# Altium PCB EVB_PHY_SZ18201_V1.0.1.PcbDoc
Units mil, origin at the board's own origin, x right, y up, seen from the top; angles counter-clockwise.
Board outline 6000 x 4000 mil, 4 copper layers (Top, L2, L3, Bottom), stack 35.4 mil thick; 66 components, 51 nets, 228 pads, 165 vias.
Unrouted connection lines stored in the file: 125.
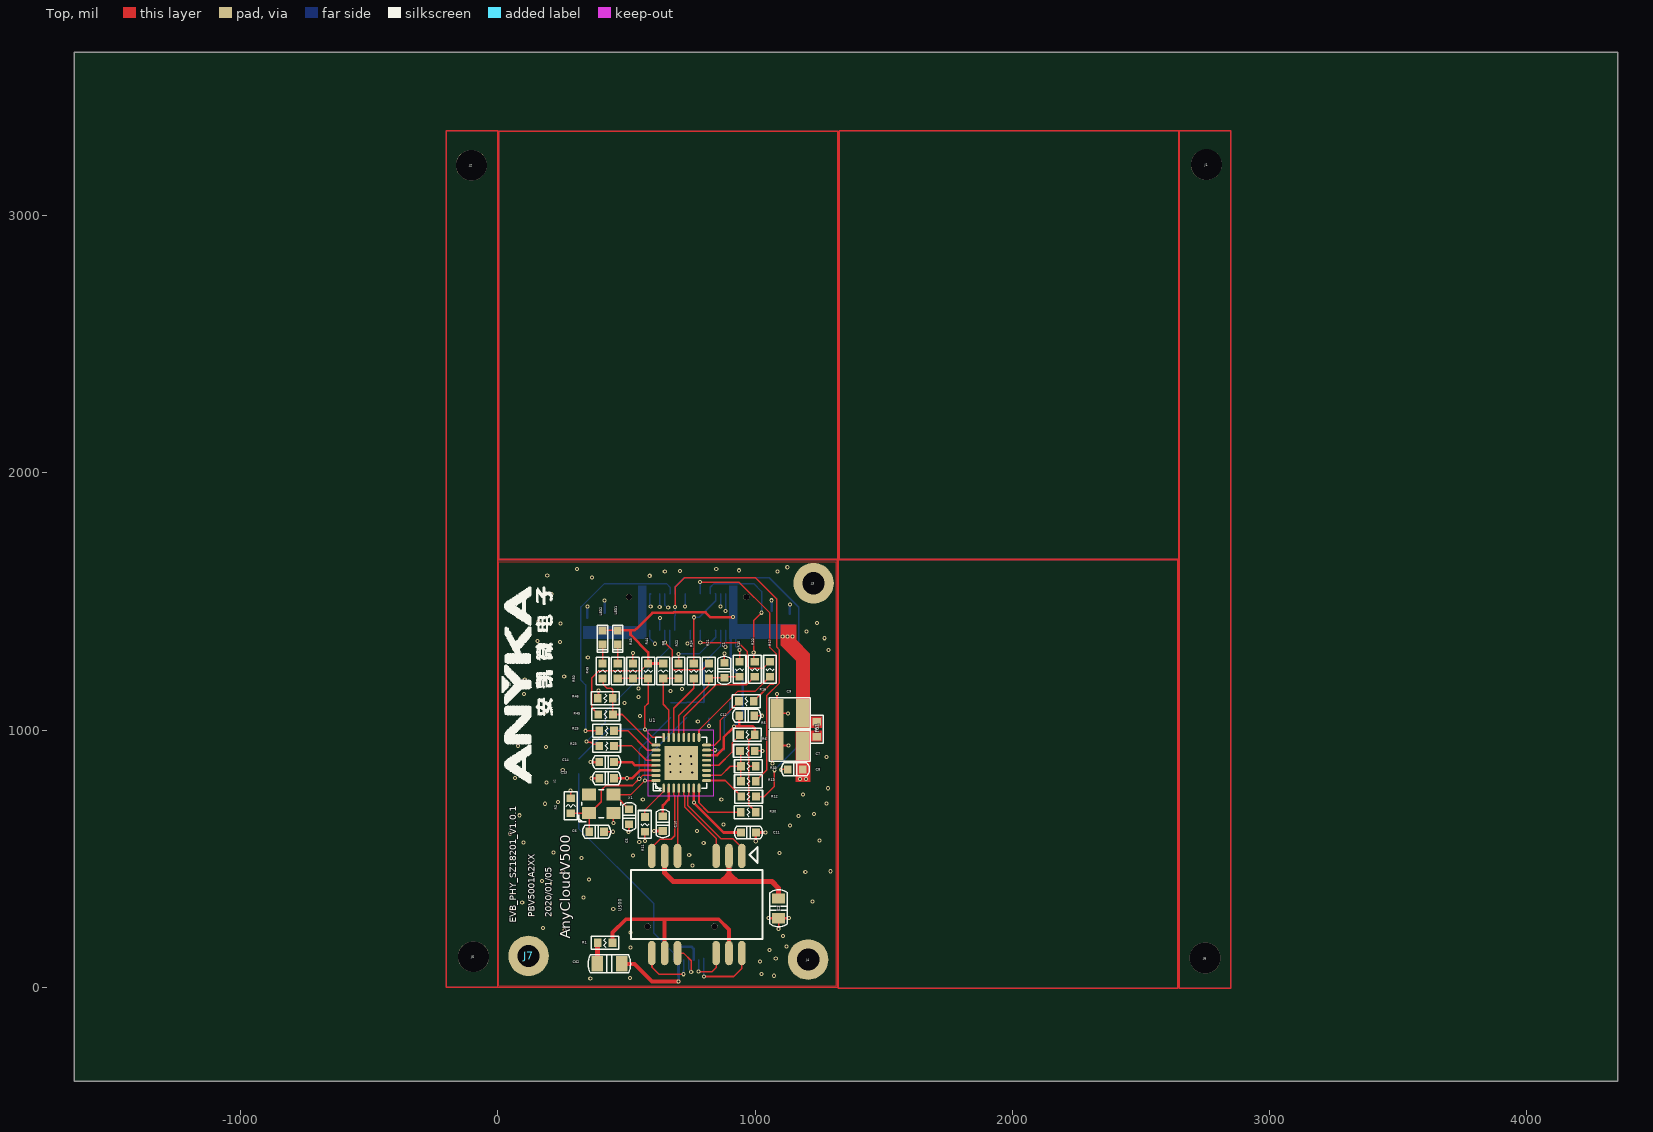
[diagram p0: Top view]
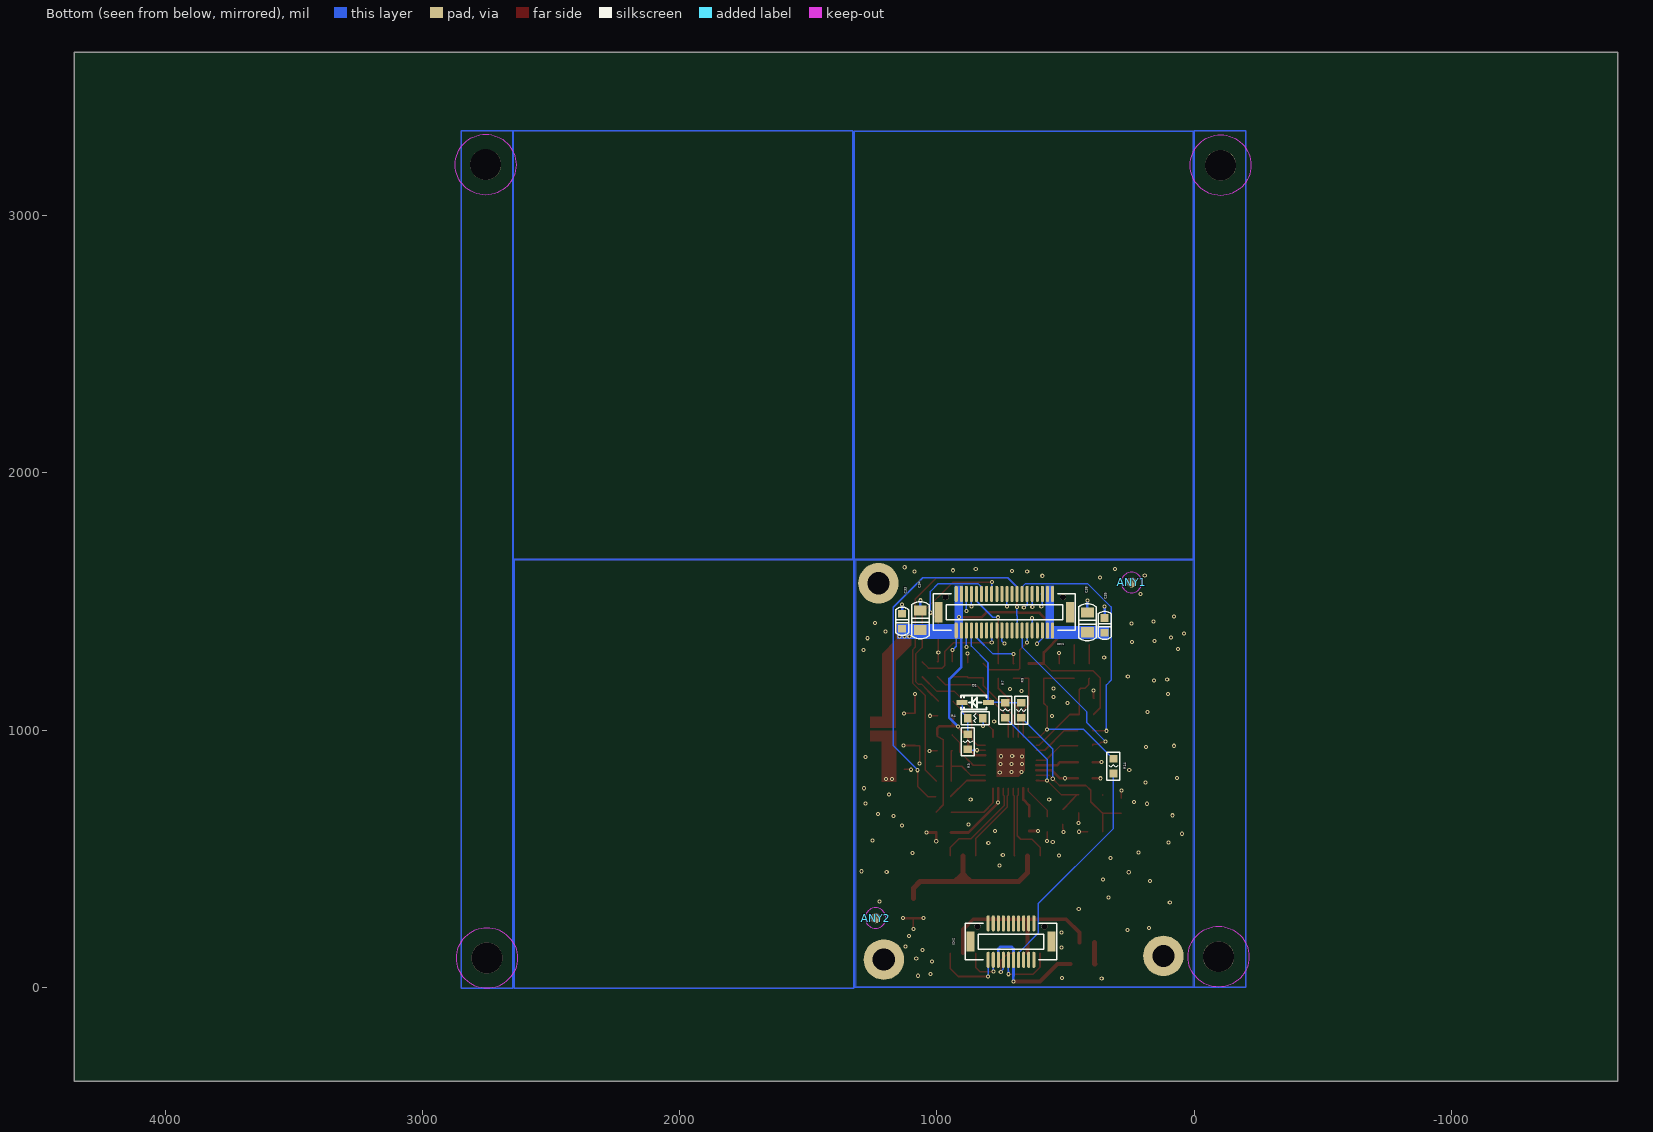
[diagram p1: Bottom view, seen from below]
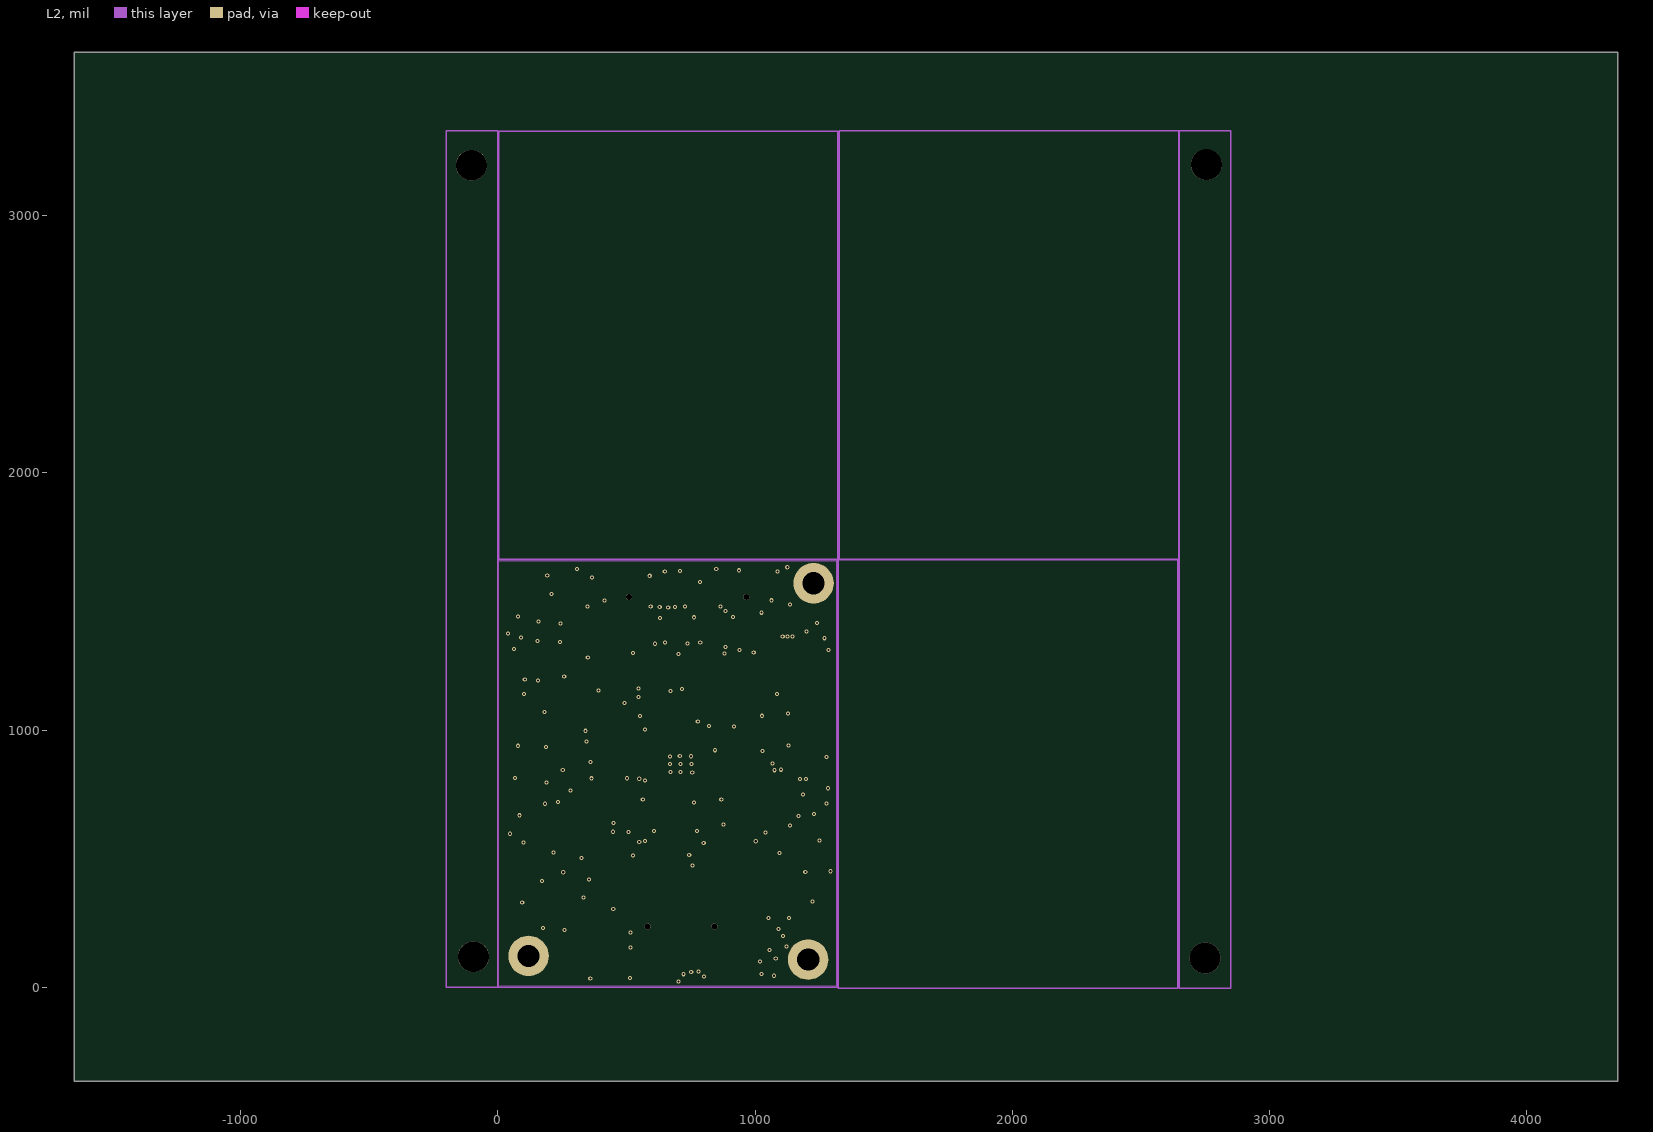
[diagram p2: L2]
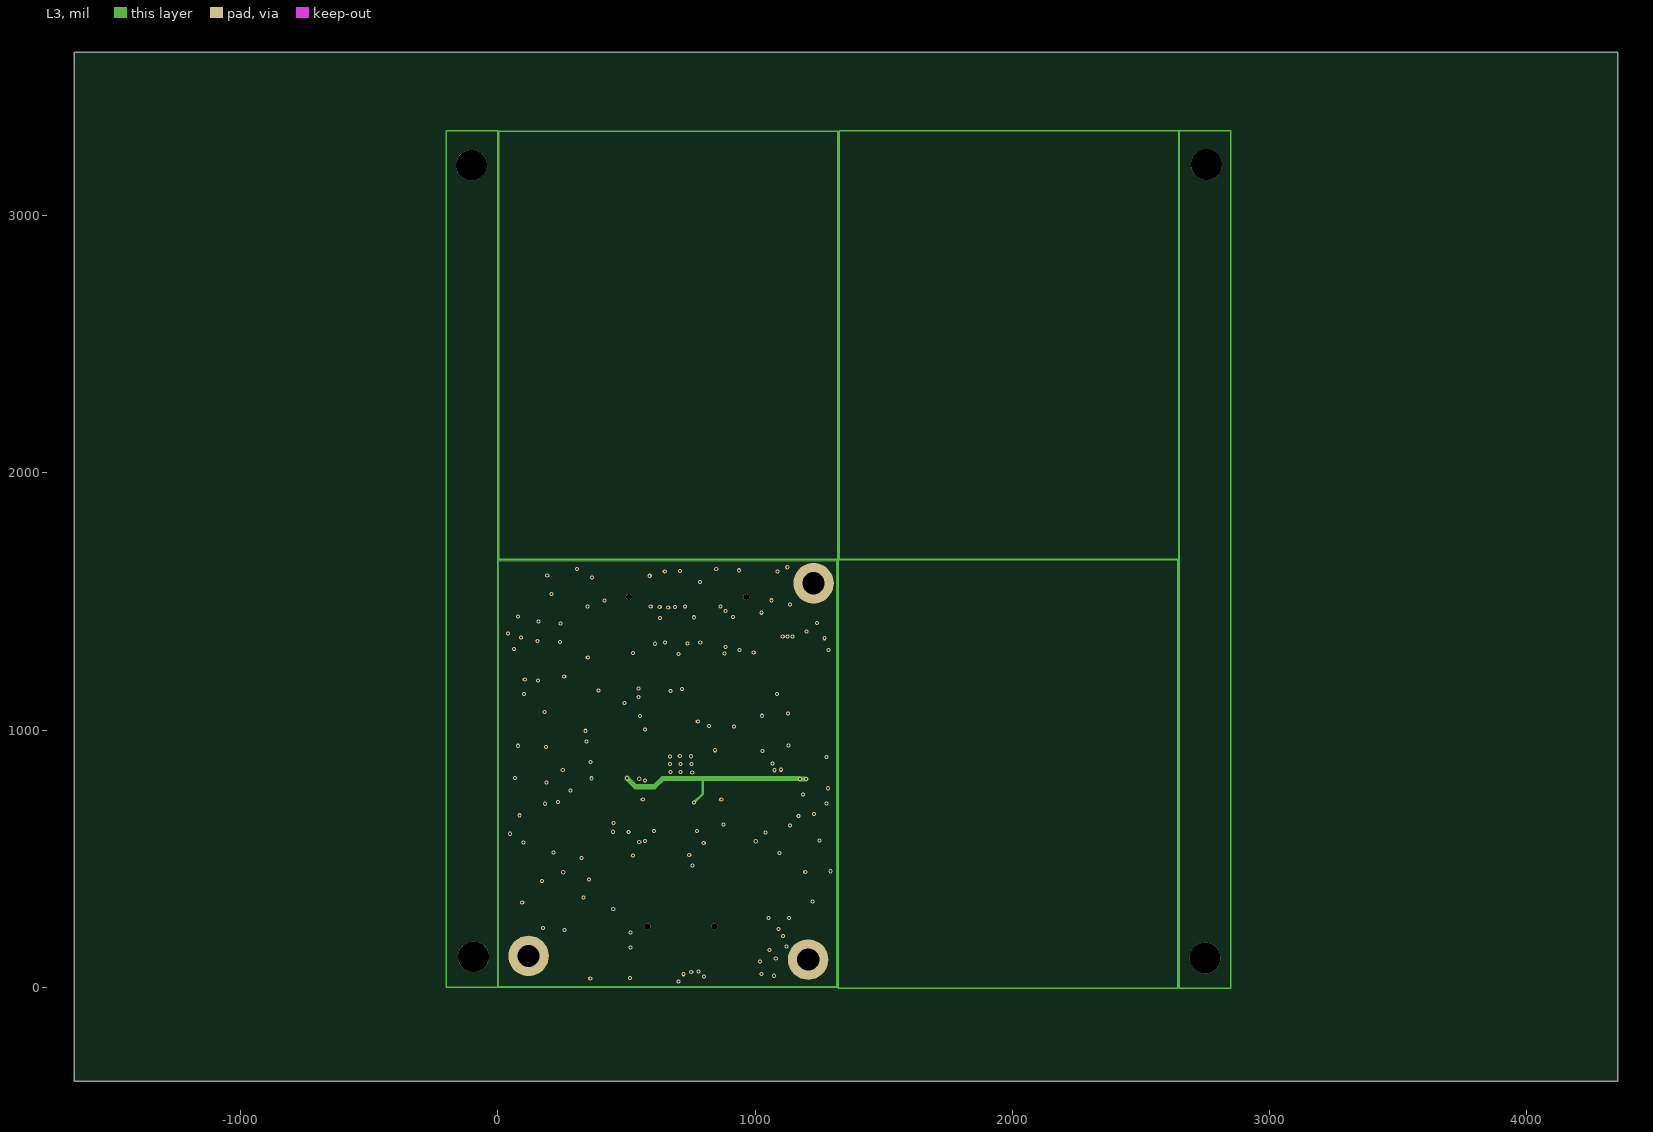
[diagram p3: L3]

## Layer stack, top to bottom
Solder Mask Top: solder mask 0.4, Solder Resist, Dk 3.5
Top: signal copper 1.35
Dielectric 1: dielectric 10, FR-4, Dk 4.3
L2: signal copper 1.35
Dielectric2: dielectric 10, FR-4, Dk 4.3
L3: signal copper 1.35
Dielectric3: dielectric 10, FR-4, Dk 4.3
Bottom: signal copper 1.35
Solder Mask Bottom: solder mask 0.4, Solder Resist, Dk 3.5

## Board outline
-1646.8,-365.1 4353.2,-365.1 4353.2,3634.9 -1646.8,3634.9

## Design rules (kind name [scope] priority, off if disabled: settings)
Clearance "Clearance - Default - DEFAULT- SMD" [IsVia vs IsSMTPin] p1: gap=6 ignorepadtopadclearanceinfootprint=FALSE
Clearance "Clearance - Default - DEFAULT - Via" [IsVia vs IsVia] p2: gap=6 ignorepadtopadclearanceinfootprint=FALSE
Clearance "Clearance - Default - DEFAULT - Net" [All] p3: gap=6 ignorepadtopadclearanceinfootprint=FALSE except(0: Arc-Hole Track-Hole SMDPad-Hole THPad-Hole Via-Hole Fill-Hole Poly-Hole Region-Hole Text-Hole; 10: Text-Text)
ComponentClearance "ComponentClearance - Default - DEFAULT" [All] p1: gap=6 collisioncheckmode=3 verticalgap=10 showdistances=FALSE
DiffPairsRouting "DiffPairsRouting - DiffPair - Default" [All] p1: maxlimit=6 minlimit=6 mostfreqgap=6 toplayer_minwidth=6 toplayer_maxwidth=6 toplayer_prefwidth=6 midlayer1_minwidth=6 midlayer1_maxwidth=6 midlayer1_prefwidth=6 midlayer2_minwidth=6 midlayer2_maxwidth=6 midlayer2_prefwidth=6 bottomlayer_minwidth=6 bottomlayer_maxwidth=6 bottomlayer_prefwidth=6 maxuncoupledlength=500
FanoutControl Fanout_Small [(CompPinCount < 5)] p3: bgadir=Out bgaviamode=Centered fanoutstyle=Auto fanoutdirection=OutThenIn viagrid=1 // Fanout_Small (Default Rule)
FanoutControl Fanout_SOIC [IsSOIC] p4: bgadir=Out bgaviamode=Centered fanoutstyle=Auto fanoutdirection=Alternating viagrid=1 // Fanout_SOIC (Default Rule)
HoleToHoleClearance "HoleToHoleClearance - Default - DEFAULT" [All] p1: gap=6 allowstackedmicrovias=TRUE
Length "Default Length" [All] p1: maxlimit=50000 minlimit=0
MaxMinImpedance "Default Impedance" [All] p1: minimum=50.00 maximum=150.0
ParallelSegment "Default Parallel Segment Same Layer" [All] p1: limit=1000 gap=200
ParallelSegment "Default Parallel Segment Adjasent" [All] p2: limit=1000 gap=200
PlaneConnect "Default PlaneConnect" [All] p1: planeconnectstyle=Direct reliefexpansion=20 reliefentries=4 reliefconductorwidth=15 reliefairgap=10
PolygonConnect "PolygonConnect - Default SMT" [IsSMTPin] p1: connectstyle=Direct reliefconductorwidth=10 reliefentries=4 polygonreliefangle="45 Angle" airgapwidth=10
PolygonConnect "PolygonConnect - Default Pad" [All] p2: connectstyle=Direct reliefconductorwidth=15 reliefentries=4 polygonreliefangle="45 Angle" airgapwidth=10
RoutingLayers "RoutingLayers - Default - DEFAULT" [All] p1: top layer_v5=TRUE mid layer 1_v5=TRUE mid layer 2_v5=TRUE bottom layer_v5=TRUE
RoutingPriority "RoutingPriority - Default - DEFAULT" [All] p1: routingpriority=3
RoutingTopology "Default Routing Topology" [All] p1: topology=Shortest
RoutingVias "RoutingVias - Default - DEFAULT" [All] p1: holewidth=8 width=16 viastyle="Through Hole" minholewidth=8 minwidth=16 maxholewidth=8 maxwidth=16
SMDToCorner "SMDToCorner - Default - DEFAULT" [All] p1: distance=60000
SolderMaskExpansion [All] p1: expansion=4 istentingtop=FALSE
Width "Default Width" [All] p1: maxlimit=40 minlimit=5 preferedwidth=6
20 further rules are at their usual default settings.

## Classes and differential pairs
differential pair TX: +TX+_NL -TX-_NL
differential pair RX: +RX-_NL -RX+_NL

## Components (designator, comment, footprint, x,y, rotation, side; value= is the part's Value field where it differs from the comment)
ANY1 "FIDU_40" FIDU_40 242.8,1574 r180 bottom
ANY2 "FIDU_40" FIDU_40 1238,269 r180 bottom
C1 "C0603" C0603 880.35,1232.21 r270 top
C2 "C0805" C0805 1091.25,307.03 r270 top
C5 "C0603" C0603 510,663.13 r90 top
C6 "C0603" C0603 383.54,604.84 r180 top
C7 "C1210" C1210 1134.29,939.59 r180 top
C8 "C0603" C0603 1156.3,847.2 r0 top
C9 "C1210" C1210 1135.03,1064.89 r180 top
C10 "C0603" C0603 640.98,636.55 r90 top
C11 "C0603" C0603 974.12,601.74 r180 top
C12 "C0603" C0603 967.1,1055.5 r180 top
C13 "C0603" C0603 422.57,812.58 r180 top
C14 "C0603" C0603 422.57,875.57 r180 top
C33 "C0603" C0603 1135,1423.1 r270 bottom
C34 "C0805" C0805 1064.3,1426.75 r270 bottom
C35 "C0603" C0603 347.77,1407.07 r270 bottom
C38 "C0805" C0805 414.7,1418.88 r270 bottom
C62 "C1206" C1206 433.11,90.99 r90 top
CON1 "CON20X2_0MM5_BTB_DF12" CON20X2_0MM5_BTB_DF12 737.53,1458.25 r180 bottom
CON2 "CON10X2_0MM5_BTB_DF12" CON10X2_0MM5_BTB_DF12 711.8,177.7 r180 bottom
D1 "GBLC03C_SOD-323_1MM4X2MM8" GBLC03C_SOD-323_1MM4X2MM8 850.96,1107.35 r0 bottom
FB1 "FB0603" FB0603 1239.4,1003 r270 top
J1 "SCREWING_H_3MM" SCREWING_H_3MM 2754,3198 r0 top
J2 "SCREWING_H_3MM" SCREWING_H_3MM -103,3196 r0 top
J3 "H_2MM2_4MM" H_2MM2_4MM 1227,1571 r0 top
J4 "H_2MM2_4MM" H_2MM2_4MM 1206,108 r0 top
J5 "SCREWING_H_3MM" SCREWING_H_3MM -95,119 r0 top
J6 "SCREWING_H_3MM" SCREWING_H_3MM 2749,114 r0 top
J7 "H_2MM2_4MM" H_2MM2_4MM 119,122 r0 top
LED1 "LED0603" LED0603 465.88,1359.82 r90 top
LED2 "LED0603" LED0603 406.82,1359.82 r90 top
R1 "R0603" R0603 416.6,173.7 r0 top
R2 "R0603" R0603 282.94,705.93 r270 top
R3 "R0603" R0603 879.52,954.99 r90 bottom
R4 "R0603" R0603 850.96,1045.98 r180 bottom
R5 "R0603" R0603 969.81,981.87 r0 top
R6 "R0603" R0603 969.81,918.88 r0 top
R7 "R0603" R0603 734.02,1077.4 r90 bottom
R8 "R0603" R0603 643.04,1229.9 r270 top
R9 "R0603" R0603 672.13,1077.23 r90 bottom
R10 "R0603" R0603 939.41,1236.15 r90 top
R11 "R0603" R0603 571.34,633.38 r90 top
R12 "R0603" R0603 974.55,741.41 r0 top
R13 "R0603" R0603 973.75,800.77 r0 top
R14 "R0603" R0603 313.75,859.86 r90 bottom
R16 "R0603" R0603 965.88,1111.79 r0 top
R17 "R0603" R0603 1057.52,1236.15 r90 top
R20 "R0603" R0603 998.46,1236.15 r90 top
R21 "R0603" R0603 820.21,1229.9 r90 top
R22 "R0603" R0603 702.1,1229.9 r90 top
R23 "R0603" R0603 422.57,938.56 r180 top
R24 "R0603" R0603 761.15,1229.9 r90 top
R25 "R0603" R0603 422.57,997.62 r180 top
R30 "R0603" R0603 973.54,680.93 r0 top
R33 "R0603" R0603 973.75,859.82 r0 top
R43 "R0603" R0603 524.93,1229.9 r90 top
R44 "R0603" R0603 583.99,1229.9 r90 top
R45 "R0603" R0603 418.63,1060.61 r180 top
R46 "R0603" R0603 417.36,1124.14 r180 top
R49 "R0603" R0603 465.88,1229.9 r90 top
R50 "R0603" R0603 406.82,1229.9 r90 top
U1 "RTL8201F_QFN32_0MM5_5X5MM" RTL8201F_QFN32_0MM5_5X5MM 712.83,872.83 r90 top
U2 "AK2020_LOGO" AK2020_LOGO 224,793 r90 top
U500 "TRC1102NLE" TRC1102NLE 773.2,321.91 r270 top
X1 "KSX23" KSX23 401.79,713.68 r0 top

## Footprints (in the part's own frame and the unit in brackets; to place one, negate y for a bottom-side part, rotate by r counter-clockwise, add the part's x,y. Pads: shape width x height; smd on the part's side, far side on the other; paste and mask are expansions set on the pad)
AK2020_LOGO [mil]
  silkscreen extent 0,12 763,208
C0603 [mil]
  rect 30x32 smd: 1(-29,0) 2(29,0)
  silkscreen extent -55,-25 55,25
C0805 [mil]
  rect 40x50 smd: 1(-38,0) 2(38,0)
  silkscreen extent -72,-34 72,34
C1206 [mil]
  rect 60x45 smd: 1(0,47.5) 2(0,-47.5)
  silkscreen extent -35,-83 35,83
C1210 [mil]
  rect 51x110 smd: 1(-50,0) 2(50,0)
  silkscreen extent -80,-60 80,60
CON10X2_0MM5_BTB_DF12 [mm]
  oval 0.3x1.6 smd: 1(-2.25,-1.8) 2(-2.25,1.8) 3(-1.75,-1.8) 4(-1.75,1.8) 5(-1.25,-1.8) 6(-1.25,1.8) 7(-0.75,-1.8) 8(-0.75,1.8) 9(-0.25,-1.8) 10(-0.25,1.8) 11(0.25,-1.8) 12(0.25,1.8) 13(0.75,-1.8) 14(0.75,1.8) 15(1.25,-1.8) 16(1.25,1.8) 17(1.75,-1.8) 18(1.75,1.8) 19(2.25,-1.8) 20(2.25,1.8)
  rect 0.8x2 smd: 41(-4,0) 42(4,0)
  round 0.6 hole 0.6 unplated: 43(-3.3,1.5) 44(3.3,1.5)
  silkscreen extent -4.5,-1.8 4.5,1.8
CON20X2_0MM5_BTB_DF12 [mm]
  oval 0.3x1.6 smd: 1(-4.75,-1.8) 2(-4.75,1.8) 3(-4.25,-1.8) 4(-4.25,1.8) 5(-3.75,-1.8) 6(-3.75,1.8) 7(-3.25,-1.8) 8(-3.25,1.8) 9(-2.75,-1.8) 10(-2.75,1.8) 11(-2.25,-1.8) 12(-2.25,1.8) 13(-1.75,-1.8) 14(-1.75,1.8) 15(-1.25,-1.8) 16(-1.25,1.8) 17(-0.75,-1.8) 18(-0.75,1.8) 19(-0.25,-1.8) 20(-0.25,1.8) 21(0.25,-1.8) 22(0.25,1.8) 23(0.75,-1.8) 24(0.75,1.8) 25(1.25,-1.8) 26(1.25,1.8) 27(1.75,-1.8) 28(1.75,1.8) 29(2.25,-1.8) 30(2.25,1.8) 31(2.75,-1.8) 32(2.75,1.8) 33(3.25,-1.8) 34(3.25,1.8) 35(3.75,-1.8) 36(3.75,1.8) 37(4.25,-1.8) 38(4.25,1.8) 39(4.75,-1.8) 40(4.75,1.8)
  rect 0.8x2 smd: 41(-6.5,0) 42(6.5,0)
  round 0.6 hole 0.6 unplated: 43(-5.8,1.5) 44(5.8,1.5)
  silkscreen extent -7,-1.8 7,1.8
FB0603 [mil]
  rect 30x32 smd: 1(-29,0) 2(29,0)
  silkscreen extent -54,-25 54,25
FIDU_40 [mil]
  round 40 smd: 1(0,0)
  Top keep-out region: 40,0 36.96,15.31 28.28,28.28 15.31,36.96 0,40 0,40 -15.31,36.96 -28.28,28.28 -36.96,15.31 -40,0 -40,0 -36.96,-15.31 -28.28,-28.28 -15.31,-36.96 0,-40 0,-40 15.31,-36.96 28.28,-28.28 36.96,-15.31 40,0
GBLC03C_SOD-323_1MM4X2MM8 [mm]
  rect 1.1x0.5 smd: A(-1.3,0) K(1.3,0)
  silkscreen extent -1.1,-0.7 1.4,0.7
H_2MM2_4MM [mil]
  round 157.5 hole 86.6: 1(0,0)
KSX23 [mil]
  rect 55.1x47.2 smd: 1(-47.24,-35.43) 2(47.24,-35.43) 3(47.24,35.43) 4(-47.24,35.43)
  silkscreen extent -87,-71 75,55
LED0603 [mil]
  rect 30x30 smd: A(27.5,0) K(-27.5,0)
  silkscreen extent -57,-20 48,20
R0603 [mil]
  rect 30x32 smd: 1(-29,0) 2(29,0)
  silkscreen extent -54,-25 54,25
RTL8201F_QFN32_0MM5_5X5MM [mm]
  oval 0.9x0.25 smd: 1(-2.5,1.75) 2(-2.5,1.25) 3(-2.5,0.75) 4(-2.5,0.25) 5(-2.5,-0.25) 6(-2.5,-0.75) 7(-2.5,-1.25) 8(-2.5,-1.75) 17(2.5,-1.75) 18(2.5,-1.25) 19(2.5,-0.75) 20(2.5,-0.25) 21(2.5,0.25) 22(2.5,0.75) 23(2.5,1.25) 24(2.5,1.75)
  oval 0.28x0.9 smd: 9(-1.75,-2.5) 10(-1.25,-2.5) 11(-0.75,-2.5) 12(-0.25,-2.5) 13(0.25,-2.5) 14(0.75,-2.5) 15(1.25,-2.5) 16(1.75,-2.5) 25(1.75,2.5) 26(1.25,2.5) 27(0.75,2.5) 28(0.25,2.5) 29(-0.25,2.5) 30(-0.75,2.5) 31(-1.25,2.5) 32(-1.75,2.5)
  rect 3.35x3.35 smd: 33(0,0)
  Top region: -1.375,0.784 -0.784,1.375 1.375,1.375 1.375,-1.375 -1.375,-1.375 -1.375,0.784
  silkscreen extent -2.75,-2.5 2.5,2.75
SCREWING_H_3MM [mil]
  round 120 hole 120 unplated: 1(0,0)
  Bottom keep-out region: 118.11,0 109.12,45.2 83.52,83.52 45.2,109.12 0,118.11 0,118.11 -45.2,109.12 -83.52,83.52 -109.12,45.2 -118.11,0 -118.11,0 -109.12,-45.2 -83.52,-83.52 -45.2,-109.12 0,-118.11 0,-118.11 45.2,-109.12 83.52,-83.52 109.12,-45.2 118.11,0
TRC1102NLE [mm]
  oval 2.4x0.75 smd: 1(-4.8,4.445) 2(-4.8,3.175) 3(-4.8,1.905) 6(-4.8,-1.905) 7(-4.8,-3.175) 8(-4.8,-4.445) 9(4.8,-4.445) 10(4.8,-3.175) 11(4.8,-1.905) 14(4.8,1.905) 15(4.8,3.175) 16(4.8,4.445)
  silkscreen extent -5.7,-6.5 3.4,6.5

## Via types
v1: diameter 16, hole 8, Top to Bottom, 165 vias

## Nets (pads, with @x,y where several pads share a name; then routed paths per layer and width w, separated by ;. In a path a pad name is that pad's centre, name@x,y a point inside that pad or via, vN(x,y) a via of type N, cw(c..) or ccw(c..) an arc to the next point about the centre after c; other vN are vias at no path point)
3V3: C9.1 C12.2 C33.2 C34.2 CON1.1 CON1.2 CON1.3 CON1.4 FB1.1 LED1.A LED2.A R5.2 R8.1 R10.2 R30.2 R33.2 R44.2 R45.2 U1.14 | length 2433.4
  Top w6: R45.2 389.63,1061.61 364.36,1086.88 364.36,1202.16 392.09,1229.9 553.99,1229.9 582.99,1258.9 R44.2 ; LED2.A LED1.A ; R10.2 v1(939.4,1310.8) ; R5.2 998.81,975.6 974.81,962.14 974.81,859.82 ; R30.2 1002.54,681.93 974.81,709.65 974.81,859.82 ; R33.2 974.81,859.82
  Top w10: LED1.A 515.49,1387.32 ; R8.1 616.04,1258.9 615.48,1258.34 611.55,1258.34 610.99,1258.9 R44.2 583.99,1302.2 515.49,1370.7 515.49,1387.32 ; U1.14 852.43,902.36 877.8,927.73 877.8,972.1 909.4,1003.7 v1(918,1013.5) 901.5,995.5 921.5,1015.5 938.1,1015.5 ; v1(913.7,1439) 825.2,1439 807.5,1457.5 682.85,1457.5 681.35,1456 600.73,1456 538.28,1393.55 537.03,1393.55 530.8,1387.32 515.49,1387.32 ; C12.2@936.8,1044.86 C12.2 938.1,1015.5 ; R5.2 998.81,1006.1 989.41,1015.5 938.1,1015.5
  Bottom w6: CON1.1 924.54,1341.41 924.5,1341.37 924.5,1325.7 v1(939.4,1310.8)
  Bottom w10: CON1.3 904.85,1245.66 951.72,1198.8 951.72,1047.22 v1(918,1013.5)
  other v1: 1126.4,1363.4 1107.1,1363.7 1145.2,1363.7
25M_PHY: CON1.7 D1.A R7.2 R9.2 | length 437.2
  Bottom w6: R9.2 734.02,1106.23 R7.2 734.02,1107.35 D1.A ; D1.A@799.78,1106.97 D1.A ; CON1.7 865.48,1326.38 801.2,1262.1 801.2,1107.35 D1.A
$$$2269: LED1.K R49.2 | length 73.4
  Top w6: R49.2 LED1.K
$$$4260: D1.K R3.2 R4.1 | length 133
  Bottom w6: R3.2 879.52,1045.98 R4.1 879.96,1046.98 901.7,1068.73 901.7,1080.79 902.14,1081.22 D1.K
$$$6636: R1.2 U500.10 U500.15 | length 753.1
  Top w15: R1.2 445.6,212.8 497.3,264.5 648.2,264.5 ; U500.10 648.2,264.5 ; U500.15 898.2,225 858.7,264.5 648.2,264.5
$$$7002: C2.1 U500.2 U500.7 | length 757.6
  Top w20: U500.7 648.2,444.2 681.4,411 868.8,411 ; U500.2 898.2,435.5 ; C2.1 1091.25,385.15 1065.4,411 929,411 ; 868.8,411 905.1,411 ; 868.8,411 893.3,435.5 898.2,435.5 ; 898.2,435.5 904.5,435.5 929,411 ; 898.2,435.5 898.2,417.9 905.1,411 ; 905.1,411 929,411
$$$10124: R12.1 U1.9 | length 160.8
  Top w6: U1.9 884.03,803.93 945.55,742.41 R12.1
$$$10327: R20.1 U1.20 | length 420
  Top w6: U1.20 722.67,1050.72 848.26,1176.3 966.61,1176.3 997.46,1207.15 R20.1
$$$10330: R17.1 U1.17 | length 390.7
  Top w6: U1.17 781.73,1000.7 931.53,1150.5 999.87,1150.5 1056.52,1207.15 R17.1
$$$10331: R16.1 U1.16 | length 240.7
  Top w6: U1.16 843.06,941.73 863.51,962.18 863.51,1037.43 936.88,1110.79 R16.1
$$$10551: LED2.K R50.2 | length 73.4
  Top w6: R50.2 LED2.K
$$$10778: R11.2 U1.1 | length 142.1
  Top w6: R11.2 571.34,689.01 643.93,761.61 U1.1
$$$10835: C10.2 U1.2 | length 118.3
  Top w10: C10.2 640.98,699.13 640.9,699.21 640.9,706.8 663.62,729.52 U1.2
$$$10878: R24.1 U1.22 | length 261.9
  Top w6: U1.22 683.3,1085.12 761.15,1162.97 R24.1
$$$10879: R8.2 R22.1 U1.23 | length 297.2
  Top w6: U1.23 663.62,1079.4 643.04,1099.98 R8.2 R22.1
$$$10880: R25.1 U1.26 | length 194.1
  Top w6: R25.1 505.25,997.62 580.82,922.04 U1.26
$$$12609: C14.1 U1.29 | length 169.5
  Top w10: C14.1 520.83,875.57 533.41,862.99 U1.29 U1.29@613.36,864.03
$$$19434: C62.1 R1.1 | length 84.7
  Top w20: C62.1 387.6,90.99 R1.1
$$$27413: CON2.13 R14.1 | length 877.7
  Bottom w6: R14.1 313.75,617.16 605.5,325.41 605.5,210.67 683.01,133.16 683.01,106.83 CON2.13
AVDD33: C7.1 C8.2 C11.2 C13.1 FB1.2 U1.7 U1.30 | length 1316.6
  Top w10: C13.1 522.1,812.58 ; v1(501.5,812.8) 521.88,812.8 522.1,812.58 ; U1.30 552.83,843.3 522.1,812.58 ; U1.7 762.04,717.08 877.39,601.74 C11.2
  L3 w10: v1(761.9,717.8) 796.3,752.2 796.3,811.8
  L3 w20: v1(501.5,812.8) 534.8,779.5 608.1,779.5 640.4,811.8 796.3,811.8 1172.7,811.8 v1(1174.3,810.2) v1(1197.6,810.2)
ETH_RX+: CON2.7 U500.11 | length 160.3
  Top w6: U500.11 721.97,132.93 751.4,103.5 v1(751.4,59.8)
  Bottom w6: CON2.7 741.33,72 751.4,61.93 v1(751.4,59.8)
ETH_RX-: CON2.9 U500.9 | length 244.9
  Top w6: U500.9 599.1,132.04 599.1,77.7 625.8,51 v1(721.5,51)
  Bottom w6: v1(721.5,51) 721.64,81.24 CON2.9
ETH_TX+: CON2.1 U500.16 | length 308.2
  Top w6: v1(800.9,42.1) 916.7,42.1 948.2,73.6 U500.16
  Bottom w6: CON2.1 800.38,113.11 800.49,113.11 800.49,42.87 800.6,42.87 800.9,48.37 v1(800.9,42.1)
ETH_TX-: CON2.3 U500.14 | length 176.4
  Top w6: v1(780.5,61.3) 833.1,61.3 848.2,76.4 U500.14
  Bottom w6: v1(780.5,61.3) 780.86,61.3 780.7,81.24 CON2.3
GND: C1.1 C2.2 C5.1 C6.1 C7.2 C8.1 C9.2 C10.1 C11.1 C12.1 C13.2 C14.2 C33.1 C34.1 C35.1 C38.1 CON1.5 CON1.6 CON1.8 CON1.19 CON1.22 CON1.30 CON1.31 CON1.32 CON1.35 CON1.36 J3.1 J4.1 J7.1 R2.1 R4.2 R6.2 R11.1 R43.2 R46.2 U1.33 X1.2 X1.4 | length 1687
  Top w6: R2.1 v1(282.94,764.99) ; X1.4@354.55,747.48 X1.4 ; R46.2 391,1124.14 v1(391,1153.9) ; C6.1 452.81,604.84 v1(446.9,604.8) ; v1(448.72,639.3) 448.72,678.25 X1.2 ; v1(507.9,603.9) 510,629.1 C5.1 ; R43.2 v1(524.9,1300.3) ; v1(571.3,569.4) v1(571.3,569.4) R11.1 ; v1@628,1480 v1(629,1479) ; C1.1 v1(880.4,1297.8) ; C12.1 v1(1026.9,1055.5) ; R6.2 1028.3,918.88 v1(1028.3,918.5) ; v1(1067,870) 1066,870 1066,939.3 C7.2 1084.7,940 v1(1130,940) ; v1(1085,1141) C9.2 1085.14,1065 v1(1128,1065) ; v1(1091.2,227.2) C2.2 ; v1(1101,846) 1101,846.9 C8.1
  Top w10: v1(359.58,875.57) C14.2 ; v1(363.51,812.58) C13.2 ; v1(607.2,607.5) v1(607.2,607.5) C10.1 ; v1(1002.4,567.9) 1002.4,601.74 C11.1 v1(1040.3,601.7) v1(1040.3,601.7) ; v1(1052.3,269) C2.2 ; C2.2 v1(1131.3,269)
  L2 w6: v1(1130,940) v1@1130,941
  Bottom w6: CON1.35 591,1386.27 591,1355 v1(610.3,1335.7) ; v1(594,1480) 594,1482.89 589.89,1487 CON1.36 CON1.36@594,1529.01 ; v1(629,1479) 629.6,1479.6 629.6,1528.78 CON1.32 ; CON1.31 629.26,1435 v1(630,1435) ; CON1.30 648.95,1485.4 v1(662,1476.7) ; v1(727.7,1480.2) CON1.22 ; v1(737.1,1336.4) 747.37,1346.67 CON1.19 ; v1(821,1015.93) 820.5,1015.93 820.5,1045.98 R4.2 ; v1(866,1479.7) 865.48,1503.52 CON1.8 CON1.8@866,1528.6 ; v1(884.5,1463) 885.17,1463.67 CON1.6 ; v1(885.5,1322.6) 885.33,1322.6 885.33,1387.38 CON1.5 CON1.5@885.77,1387.38
  Bottom w10: C35.1 v1@347.77,1480.37 ; v1@347.8,1480.4 v1(348.7,1480.4) ; C38.1 v1(414.7,1503.8) ; C34.1 v1(1064.3,1504.6) ; C33.1 v1(1135,1488)
  other v1: 359.1,34 512.9,36.1 1073,45 1025.2,52 1019,101 1080.2,111.7 1056.3,145.2 515,155 1122,158 1108,200 516,213 258.5,223.5 174.9,230.7 448.3,304.8 94.4,329.3 1223.6,334.1 333.3,349.5 171.2,413.5 354,419.2 254.1,447.4 1195,448.8 1293,451.2 755.9,473.8 325.7,502.1 525.9,511.9 743.7,514.9 1094.5,522.9 216.5,524.7 800,560.6 99.2,563.5 549.5,565.5 1249.9,570.7 46.6,597 773.3,607.8 1134.8,629.6 877.5,633.1 1168.5,665.7 84,668.7 1228.4,673.5 183.1,713.7 1278,715 233.2,720.7 563.2,730.1 868.4,730.1 1186,750.1 1283.4,773.9 189.1,795.9 65.7,813.4 755.5,835.8 670.3,836.4 710.4,836.4 252.1,844.2 669,868.1 752.7,868.1 709.3,868.4 1277,896 668.5,897.7 751.2,898.2 707.1,899.5 187.6,934.5 77.7,938.9 777.1,1034 552.1,1054.7 181.5,1070 492.6,1105.8 546.9,1128.1 101.6,1139.7 671.1,1151.8 715.8,1159.3 545.8,1161.8 155.6,1193.4 104.5,1197.1 257.7,1208.6 349.4,1281.5 1285.8,1311.8 63.1,1314.5 240.9,1342.6 154.1,1345.6 1269.6,1357.2 89.6,1359.6 39.4,1375.1 1199,1383 244,1414.1 1240.4,1417 157.2,1421.8 77.7,1442 208.6,1528.3 365.4,1592.6 590.1,1599.8 191.8,1601.4 648.8,1616.2 1087.4,1616.6 708.1,1618.7 937,1621.2 308.1,1626.1 848.8,1626.1 1125,1633
GND_EARTH: C62.2 CON2.5 CON2.11 | length 484.6
  Top w15: C62.2 531.31,90.99 599.1,23.2 v1(702.2,23.2)
  Bottom w10: v1(702.2,23.2) 702.1,59.6 701.96,81.24 CON2.11 701.96,149.33 710.63,158 752.4,158 761.01,149.39 CON2.5
LED0_NL: R14.2 R43.1 R44.1 R49.1 U1.24 | length 712.2
  Top w6: R49.1 R43.1 R44.1 583.99,1104.49 571.6,1092.1 v1(571.6,1002.6) 585.31,988.89 585.31,988.25 602.3,971.26 U1.24
  Bottom w6: R14.2 314.75,888.86 428.49,1002.6 v1(571.6,1002.6)
LED1_NL: R45.1 R46.1 R50.1 U1.25 | length 383.6
  Top w6: R50.1 409.2,1198.52 409.2,1177.2 423.8,1162.6 440.2,1162.6 446.36,1156.44 R46.1 446.36,1060.61 R45.1 483.32,1060.61 602.2,941.73 U1.25
MAC_MDCLK: CON1.10 R24.2 | length 318.4
  Top w6: R24.2 761.15,1351.95 761.6,1352.4 v1(761.6,1438.5)
  Bottom w6: v1(761.6,1438.5) 782.26,1438.5 846.54,1502.78 846.54,1529.11 CON1.10
MAC_MDIO: CON1.9 R22.2 | length 235.6
  Top w6: R22.2 702.6,1258.9 v1(702.6,1296.1)
  Bottom w6: v1(702.6,1296.1) 781.59,1296.1 846.54,1361.05 846.54,1387.38 CON1.9
MAC_RSTN: CON1.29 R21.2 | length 314.1
  Top w6: v1(648.9,1340.8) 677.1,1312.6 677.1,1240.17 682.37,1234.9 795.21,1234.9 819.21,1258.9 R21.2
  Bottom w6: v1(648.9,1340.8) 648.95,1361.79 CON1.29
MAC_RXD0: CON1.26 R12.2 | length 1395.4
  Top w6: R12.2 1035,741.58 1075,781.58 v1(1075,844)
  Bottom w6: CON1.26 687.56,1529.11 687.56,1555.46 724.1,1592 1055.04,1592 1169.4,1477.64 1169.4,964 1169.4,940.4 1150.04,921.04 ; v1(1075,844) 1074.02,844.98 1150.04,921
MAC_RXD1: CON1.25 R13.2 | length 1363.4
  Top w6: v1(688.8,1478.3) 688.8,1555.14 725.66,1592 1000.94,1592 1084.6,1508.34 1084.6,1321.67 1094.52,1311.75 1094.52,1204 1094.52,1183.45 1045.35,1134.28 1045.35,844.36 1002.75,801.77 R13.2
  Bottom w6: CON1.25 688.32,1444.32 688.8,1444.8 v1(688.8,1478.3)
MAC_RXDV: CON1.28 R25.2 | length 960.2
  Top w6: v1(341,997.2) 393.57,997.2 R25.2 R25.2@393.57,998.62
  Bottom w6: v1(341,997.2) 341,1175.7 322.7,1194 322.7,1478.44 413.96,1569.7 655.05,1569.7 669.34,1555.41 669.34,1529.11 CON1.28
MAC_RXER: CON1.27 R23.2 | length 627.9
  Top w6: v1(343.9,955.6) 343.9,953.09 360.9,953.09 369.57,944.42 393.57,944.42 R23.2
  Bottom w6: v1(343.9,955.6) 416.8,1028.5 416.8,1070.75 668.63,1322.58 CON1.27
MAC_TXD0: CON1.16 R16.2 | length 764.3
  Top w6: v1(786.2,1575) 937.61,1575 1057.3,1455.31 1057.3,1320.55 1082.52,1295.33 1082.52,1188.42 1072.8,1178.7 1060.1,1178.7 1035.4,1154 1035.4,1153.31 994.88,1112.79 R16.2
  Bottom w6: v1(786.2,1575) 786.74,1554.7 CON1.16
MAC_TXD1: CON1.15 R17.2 | length 401.1
  Top w6: v1(786.5,1340.1) 934.14,1340.1 968.9,1305.34 968.9,1250.98 978.78,1241.1 1032.47,1241.1 1056.52,1265.15 R17.2
  Bottom w6: v1(786.5,1340.1) 786.74,1361.79 CON1.15
MAC_TXEN: CON1.12 R20.2 | length 535.9
  Top w6: R20.2 994.4,1265.15 v1(994.4,1302.2) 994.4,1425.7 v1(1025,1456.3)
  Bottom w6: CON1.12 825.36,1529.11 825.36,1555.46 839.6,1569.7 994.3,1569.7 1025,1539 v1(1025,1456.3)
RESET: C1.2 R10.1 R21.1 U1.21 | length 403.6
  Top w6: U1.21 702.99,1056.67 820.21,1173.89 R21.1 820.21,1203.21 C1.2 880.35,1207.15 R10.1
RX+_NL: U1.4 U500.6 | length 266.1
  Top w6: U500.6 699.15,510.89 699.15,743.76 702.99,747.6 U1.4
RX-_NL: U1.3 U500.8 | length 327.4
  Top w6: U500.8 598.2,543.37 630.14,575.3 673.6,575.3 687.15,588.85 687.15,743.76 683.3,747.6 U1.3
RXD1_NL: R6.1 R13.1 R33.1 U1.10 | length 270.5
  Top w6: U1.10 867.45,823.62 903.65,859.82 R33.1 ; R6.1 944.75,918.88 R33.1 ; R13.1 R33.1
RXD3_NL: R5.1 U1.12 | length 200.4
  Top w6: U1.12 858.81,862.99 910.14,914.32 910.14,950.2 940.81,980.87 R5.1
RXDV: R30.1 U1.8 | length 235
  Top w6: U1.8 781.73,717.2 818,680.93 R30.1
RXER_NL: R23.1 U1.28 | length 186
  Top w6: R23.1 521,938.56 576.88,882.67 U1.28
TX+_NL: U1.6 U500.1 | length 379.7
  Top w6: U1.6 742.36,747.6 738.52,743.76 738.52,705.77 867.09,577.2 914.37,577.2 948.2,543.37 U500.1
TX-_NL: U1.5 U500.3 | length 316
  Top w6: U1.5 722.67,747.6 726.52,743.76 726.52,700.8 848.56,578.76 848.56,510.89 U500.3
TXC: R3.1 U1.15 | length 72.5
  Top w6: U1.15 812.2,922.04 v1(844.5,921.8)
  Bottom w6: v1(844.5,921.8) 879.52,921.8 R3.1
WIFI_3V3: C35.2 C38.2 CON1.37 CON1.38 CON1.39 CON1.40
XI_NL: C5.2 R7.1 U1.32 X1.3 | length 586
  Top w6: C5.2 508.52,692.13 453.8,749.11 X1.3 517.11,749.11 v1(571.5,803.5) 602.2,803.93 U1.32
  Bottom w6: v1(571.5,803.5) 571.5,886.89 733.02,1048.4 R7.1
XO_NL: C6.2 R2.2 R9.1 U1.31 X1.1 | length 781.3
  Top w6: R2.2 354.55,676.93 X1.1 ; C6.2@354.55,604.84 X1.1 ; U1.31 562.32,823.62 v1(549.4,810.7) 523.3,784.6 420.65,784.6 401.8,765.75 401.8,721.55 358.5,678.25 X1.1
  Bottom w6: v1(549.4,810.7) 549.4,926.51 671.13,1048.23 R9.1
pads on no net: ANY1.1 ANY2.1 CON1.11 CON1.13 CON1.14 CON1.17 CON1.18 CON1.20 CON1.21 CON1.23 CON1.24 CON1.33 CON1.34 CON1.41 CON1.42 CON1.43 CON1.44 CON2.2 CON2.4 CON2.6 CON2.8 CON2.10 CON2.12 CON2.14 CON2.15 CON2.16 CON2.17 CON2.18 CON2.19 CON2.20 CON2.41 CON2.42 CON2.43 CON2.44 J1.1 J2.1 J5.1 J6.1 U1.11 U1.13 U1.18 U1.19 U1.27

## Polygon pours and split planes (outlines as drawn)
GND on L2 (solid, remove dead copper, pour order 0): 3,1659 1315,1659 1315,4 3,4
GND on Bottom (solid, remove dead copper, pour order 1): 3,1660 1316,1660 1316,3 3,3
GND on Top (solid, remove dead copper, pour order 2): 4,1655 1314,1655 1314,4 4,4
GND on L3 (solid, remove dead copper, pour order 3): 3,1659 1316,1659 1316,3 3,3

## Keep-outs
Top:
  region: 839.6,999.5 581.6,999.5 581.6,744.5 839.6,744.5 839.6,999.5

## Other copper
Top:
  pour cut-out: 1217,1054 1261,1054 1261,952 1217,952 1217,1054
  region net AVDD33: 1157,997 1157,799 1214,799 1214,957 1258,957 1258,997 1157,997
  region net 3V3: 1159,1010 1159,1270 1100,1329 1100,1410 1159,1410 1159,1351 1212.5,1297.5 1212.5,1051 1259,1051 1259,1010 1159,1010
L2:
  pour cut-out: 1215,1056 1261,1056 1261,952 1215,952 1215,1056
L3:
  pour cut-out: 1216,1053 1261,1053 1261,952 1216,952 1216,1053
Bottom:
  region net 3V3: 898.95,1560.61 898.95,1355.88 1154.85,1355.88 1154.85,1411 930.44,1411 930.44,1560.61 898.95,1560.61
  region net WIFI_3V3: 332.02,1403.13 544.62,1403.13 544.62,1560.61 576.11,1560.61 576.11,1355.88 332.02,1355.88 332.02,1403.13
  pour cut-out: 1217,1057 1261,1057 1261,952 1217,952 1217,1057
Multi-Layer:
  lines w5: -201,1 -201,3329 -1,3329 -1,1 -201,1 ; 0,-0.5 0,1664.5 1319,1664.5 1319,-0.5 0,-0.5 ; 3,1663 3,3328 1322,3328 1322,1663 3,1663 ; 1323,-3 1323,1662 2642,1662 2642,-3 1323,-3 ; 1327,1664 1327,3329 2646,3329 2646,1664 1327,1664 ; 2648,-3 2648,3329 2848,3329 2848,-3 2648,-3
  text "_ _ _ V_CUT" at -7,3337 h40 r90
  text "_ _ _ V_CUT" at 1312,3337 h40 r90
  text "_ _ _ V_CUT" at 2636,3337 h40 r90
  text "_ _ _ V_CUT" at 1329,-7 h40 r270
  text "_ _ _ V_CUT" at 8,-9 h40 r270
  text "_ _ _ V_CUT" at 2654,-16 h40 r270

## Silkscreen, mask and mechanical layers (free items; w line width, h text height)
Silkscreen Top:
  text "PBV5001A2XX" at 143,273 h25 r90
  text "2020/01/05" at 209,273 h25 r90
  text "EVB_PHY_SZ18201_V1.0.1" at 71,251 h25 r90
  text "AnyCloudV500" at 282,188 h40 r90